# Altium PCB Split_Photodiodes_Pumps2026.PcbDoc
Units mil, origin at the board's own origin, x right, y up, seen from the top; angles counter-clockwise.
Board outline 6000 x 4000 mil, 2 copper layers (Top Layer, Bottom Layer); 21 components, 16 nets, 72 pads, 0 vias.
Unrouted connection lines stored in the file: 52.
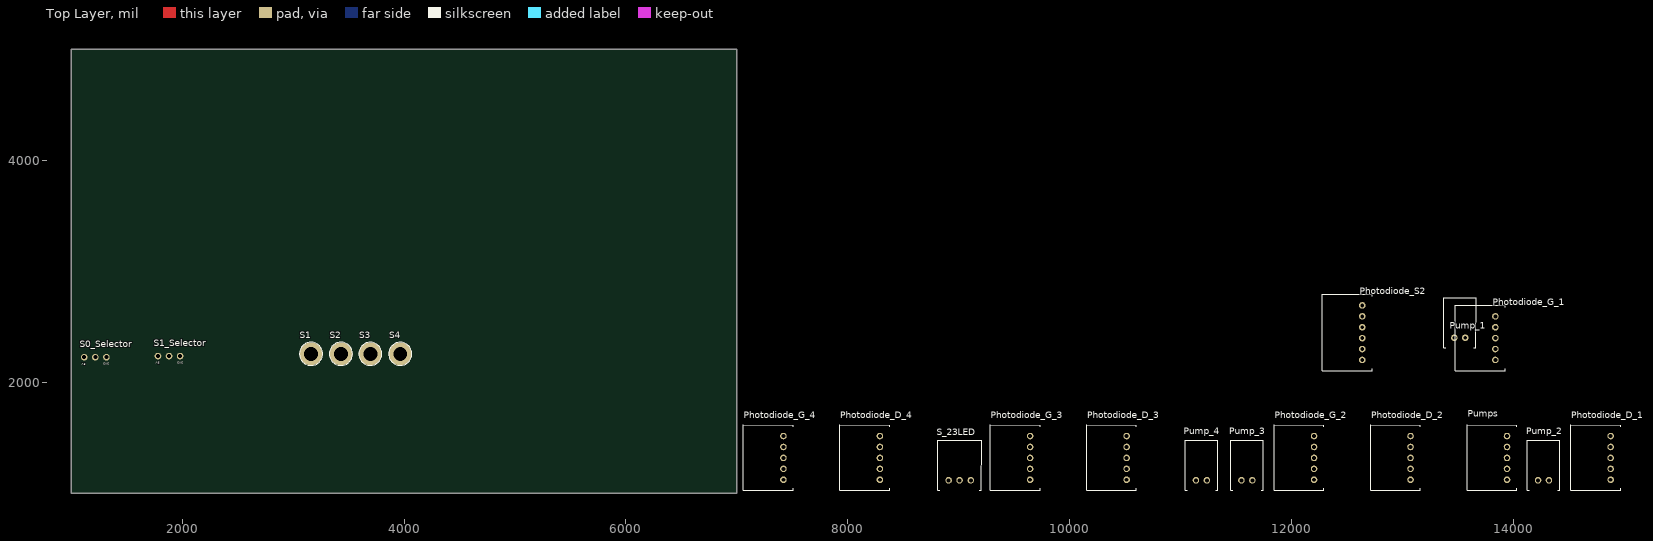
[diagram p0: Top Layer view]
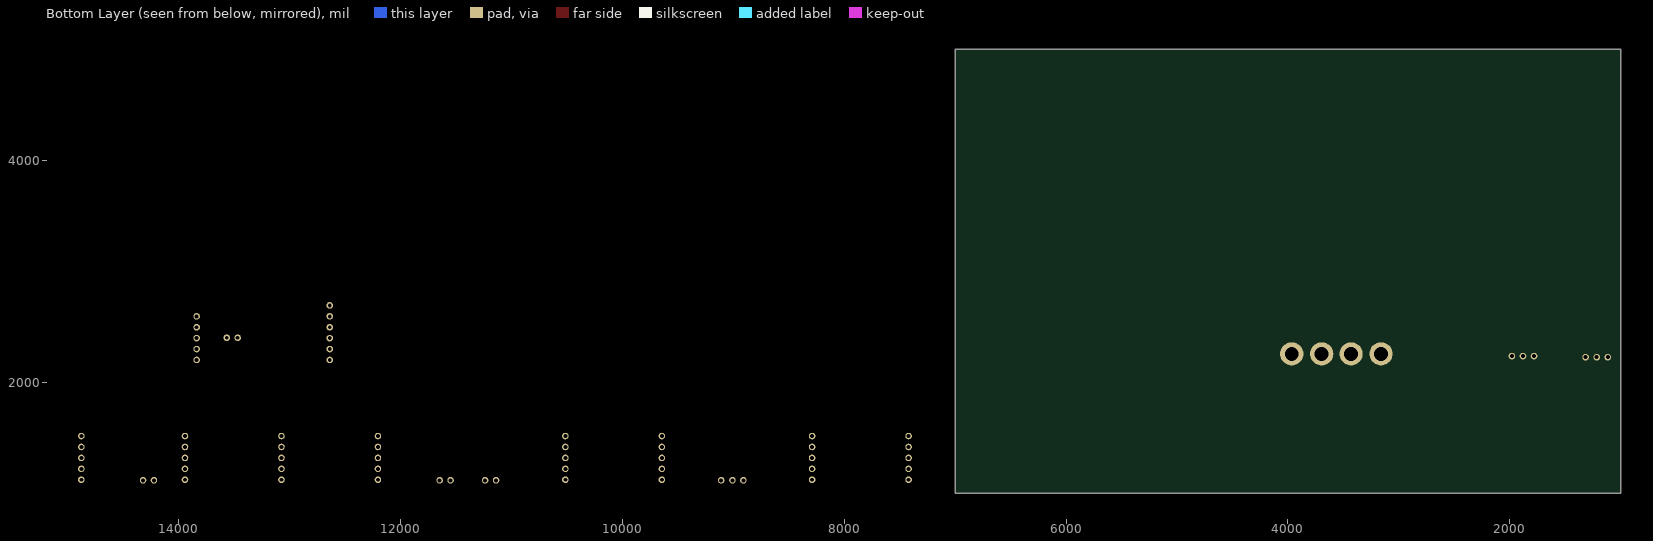
[diagram p1: Bottom Layer view, seen from below]

## Layer stack, top to bottom
Top Solder: solder mask 0.4, Solder Resist, Dk 3.5
Top Layer: signal copper 1.4
Dielectric 1: dielectric 12.6, FR-4, Dk 4.8
Bottom Layer: signal copper 1.4
Bottom Solder: solder mask 0.4, Solder Resist, Dk 3.5

## Board outline
1000,1000 7000,1000 7000,5000 1000,5000

## Design rules (kind name [scope] priority, off if disabled: settings)
Clearance [All] p1: gap=10 ignorepadtopadclearanceinfootprint=FALSE
PolygonConnect [All] p1: connectstyle=Relief reliefconductorwidth=10 reliefentries=4 polygonreliefangle="90 Angle" airgapwidth=10
RoutingVias [All] p1: holewidth=28 width=50 viastyle="Through Hole" minholewidth=28 minwidth=50 maxholewidth=28 maxwidth=50
SolderMaskExpansion [All] p1: expansion=4 istentingtop=FALSE
SupplyNets "Schematic Supply Nets_4" [InNet('12V_A')] p1: voltage=0.000
SupplyNets "Schematic Supply Nets_3" [InNet('5V_A')] p2: voltage=0.000
SupplyNets "Schematic Supply Nets" [InNet('GND_A')] p3: voltage=0.000
Width [All] p1: maxlimit=10 minlimit=10 preferedwidth=10
30 further rules are at their usual default settings.

## Classes and differential pairs
component class Split_photodiodes_Pumps2026: Photodiode_G_1 Photodiode_S2 Pump_1 S0_Selector S1 S1_Selector S2 S3 S4 S_23LED

## Components (designator, comment, footprint, x,y, rotation, side; value= is the part's Value field where it differs from the comment)
Photodiode_D_1 "Header 5H" S5B-XH-A 14880,1120 r90 top
Photodiode_D_2 "Header 5H" S5B-XH-A 13075,1120 r90 top
Photodiode_D_3 "Header 5H" S5B-XH-A 10515,1120 r90 top
Photodiode_D_4 "Header 5H" S5B-XH-A 8290,1120 r90 top
Photodiode_G_1 "Header 5H" S5B-XH-A 13840,2200 r90 top
Photodiode_G_2 "Header 5H" S5B-XH-A 12205,1120 r90 top
Photodiode_G_3 "Header 5H" S5B-XH-A 9645,1120 r90 top
Photodiode_G_4 "Header 5H" S5B-XH-A 7420,1120 r90 top
Photodiode_S2 "Header 6H" S6B-XH-A 12640,2200 r90 top
Pump_1 "Header 2H" S2B-XH-A 13470,2400 r0 top
Pump_2 "Header 2H" S2B-XH-A 14225,1115 r0 top
Pump_3 "Header 2H" S2B-XH-A 11550,1115 r0 top
Pump_4 "Header 2H" S2B-XH-A 11140,1115 r0 top
Pumps "Header 5H" S5B-XH-A 13945,1120 r90 top
S0_Selector "Voltage Selector" "VOLTAGE SELECTOR" 1215,2225 r90 top
S1 "Screw M3" "Screw M3" 3160,2255 r0 top
S1_Selector "Voltage Selector" "VOLTAGE SELECTOR" 1880,2235 r90 top
S2 "Screw M3" "Screw M3" 3430,2255 r0 top
S3 "Screw M3" "Screw M3" 3695,2255 r0 top
S4 "Screw M3" "Screw M3" 3965,2255 r0 top
S_23LED "Header 3" S3B-XH-A 8910,1115 r0 top

## Footprints (in the part's own frame and the unit in brackets; to place one, negate y for a bottom-side part, rotate by r counter-clockwise, add the part's x,y. Pads: shape width x height; smd on the part's side, far side on the other; paste and mask are expansions set on the pad)
S2B-XH-A [mm]
  round 1.5 hole 0.9: 1(0,0) 2(2.5,0)
  silkscreen extent -2.45,-2.26 5,9.14, body extent -2.41,-2.32 4.99,9.18, height 6.15
S3B-XH-A [mm]
  round 1.5 hole 0.9: 1(0,0) 2(2.5,0) 3(5.08,0)
  silkscreen extent -2.45,-2.26 7.54,9.14, body extent -2.44,-2.27 7.46,9.23, height 6.15
S5B-XH-A [mm]
  round 1.5 hole 0.9: 1(0,0) 2(2.5,0) 3(5,0) 4(7.5,0) 5(10,0)
  silkscreen extent -2.45,-2.26 12.58,9.14, body extent -2.45,-2.3 12.45,9.2, height 6.15
S6B-XH-A [mm]
  round 1.5 hole 0.9: 1(0,0) 2(2.5,0) 3(5,0) 4(7.5,0) 5(10,0) 6(12.5,0)
  silkscreen extent -2.45,-2.26 15.08,9.14, body extent -2.45,-2.3 14.95,9.2, height 6.15
"Screw M3" [mm] "M3 iso Screw"
  round 5.32 hole 3.2 unplated: 0(0,0)
  silkscreen extent -2.66,-2.66 2.66,2.66
"VOLTAGE SELECTOR" [mil] "3 Pads for Voltage Selection"
  round 60 hole 35.43: 1(0,100) 2(0,-100) 3(0,0)
  body extent -50,-150 50,150, height 340

## Part data
Photodiode_D_1 Photodiode_D_2 Photodiode_D_3 Photodiode_D_4 Photodiode_G_1 Photodiode_G_2 Photodiode_G_3 Photodiode_G_4 Pumps: "Header, 5-Pin, Right Angle", LatestRevisionDate=17-Jul-2002, LatestRevisionNote="Re-released for DXP Platform.", Publisher="Altium Limited"
Photodiode_S2: "Header, 6-Pin, Right Angle", LatestRevisionDate=17-Jul-2002, LatestRevisionNote="Re-released for DXP Platform.", Publisher="Altium Limited"
Pump_1 Pump_2 Pump_3 Pump_4: "Header, 2-Pin, Right Angle", LatestRevisionDate=17-Jul-2002, LatestRevisionNote="Re-released for DXP Platform.", Publisher="Altium Limited"
S0_Selector S1_Selector: "Selection of voltage by soldering pads"
S_23LED: "Header, 3-Pin", LatestRevisionDate=17-Jul-2002, LatestRevisionNote="Re-released for DXP Platform.", Publisher="Altium Limited"

## Nets (pads, with @x,y where several pads share a name; then routed paths per layer and width w, separated by ;. In a path a pad name is that pad's centre, name@x,y a point inside that pad or via, vN(x,y) a via of type N, cw(c..) or ccw(c..) an arc to the next point about the centre after c; other vN are vias at no path point)
5V_A: Photodiode_G_1.5 Photodiode_G_2.5 Photodiode_G_3.5 Photodiode_G_4.5 Photodiode_S2.1 S0_Selector.1 S1_Selector.1
12V_A: Pump_1.1 Pump_2.1 Pump_3.1 Pump_4.1 Pumps.1
GND_A: Photodiode_G_1.1 Photodiode_G_1.3 Photodiode_G_1.4 Photodiode_G_2.1 Photodiode_G_2.3 Photodiode_G_2.4 Photodiode_G_3.1 Photodiode_G_3.3 Photodiode_G_3.4 Photodiode_G_4.1 Photodiode_G_4.3 Photodiode_G_4.4 Photodiode_S2.6 S0_Selector.2 S1_Selector.2
LED: Photodiode_G_1.2 Photodiode_G_2.2 Photodiode_G_3.2 Photodiode_G_4.2 S_23LED.3
OUT_1: Photodiode_D_1.1 Photodiode_S2.2
OUT_2: Photodiode_D_2.1 Photodiode_S2.3
OUT_3: Photodiode_D_3.1 Photodiode_S2.4
OUT_4: Photodiode_D_4.1 Photodiode_S2.5
Pump_1: Pump_1.2 Pumps.2
Pump_2: Pump_2.2 Pumps.3
Pump_3: Pump_3.2 Pumps.4
Pump_4: Pump_4.2 Pumps.5
S0: Photodiode_D_1.5 Photodiode_D_2.5 Photodiode_D_3.5 Photodiode_D_4.5 S0_Selector.3
S1: Photodiode_D_1.4 Photodiode_D_2.4 Photodiode_D_3.4 Photodiode_D_4.4 S1_Selector.3
S2: Photodiode_D_1.3 Photodiode_D_2.3 Photodiode_D_3.3 Photodiode_D_4.3 S_23LED.1
S3: Photodiode_D_1.2 Photodiode_D_2.2 Photodiode_D_3.2 Photodiode_D_4.2 S_23LED.2
pads on no net: S1.0 S2.0 S3.0 S4.0

## Text inside footprints (layer, text, board x,y; h text height)
S0_Selector: Top Overlay "5V" at 1131,2172 h20 r180; Top Overlay "3V3" at 1342,2173 h20 r180
S1_Selector: Top Overlay "5V" at 1796,2182 h20 r180; Top Overlay "3V3" at 2007,2183 h20 r180